# Altium PCB CAN_TO_USART_V2.2.PcbDoc (part 2 of 2)
Units mil, origin at the board's own origin, x right, y up, seen from the top; angles counter-clockwise.
Board outline 2554.34 x 2204.34 mil, 2 copper layers (Top Layer, Bottom Layer); 154 components, 100 nets, 467 pads, 218 vias.
Unrouted connection lines stored in the file: 118.
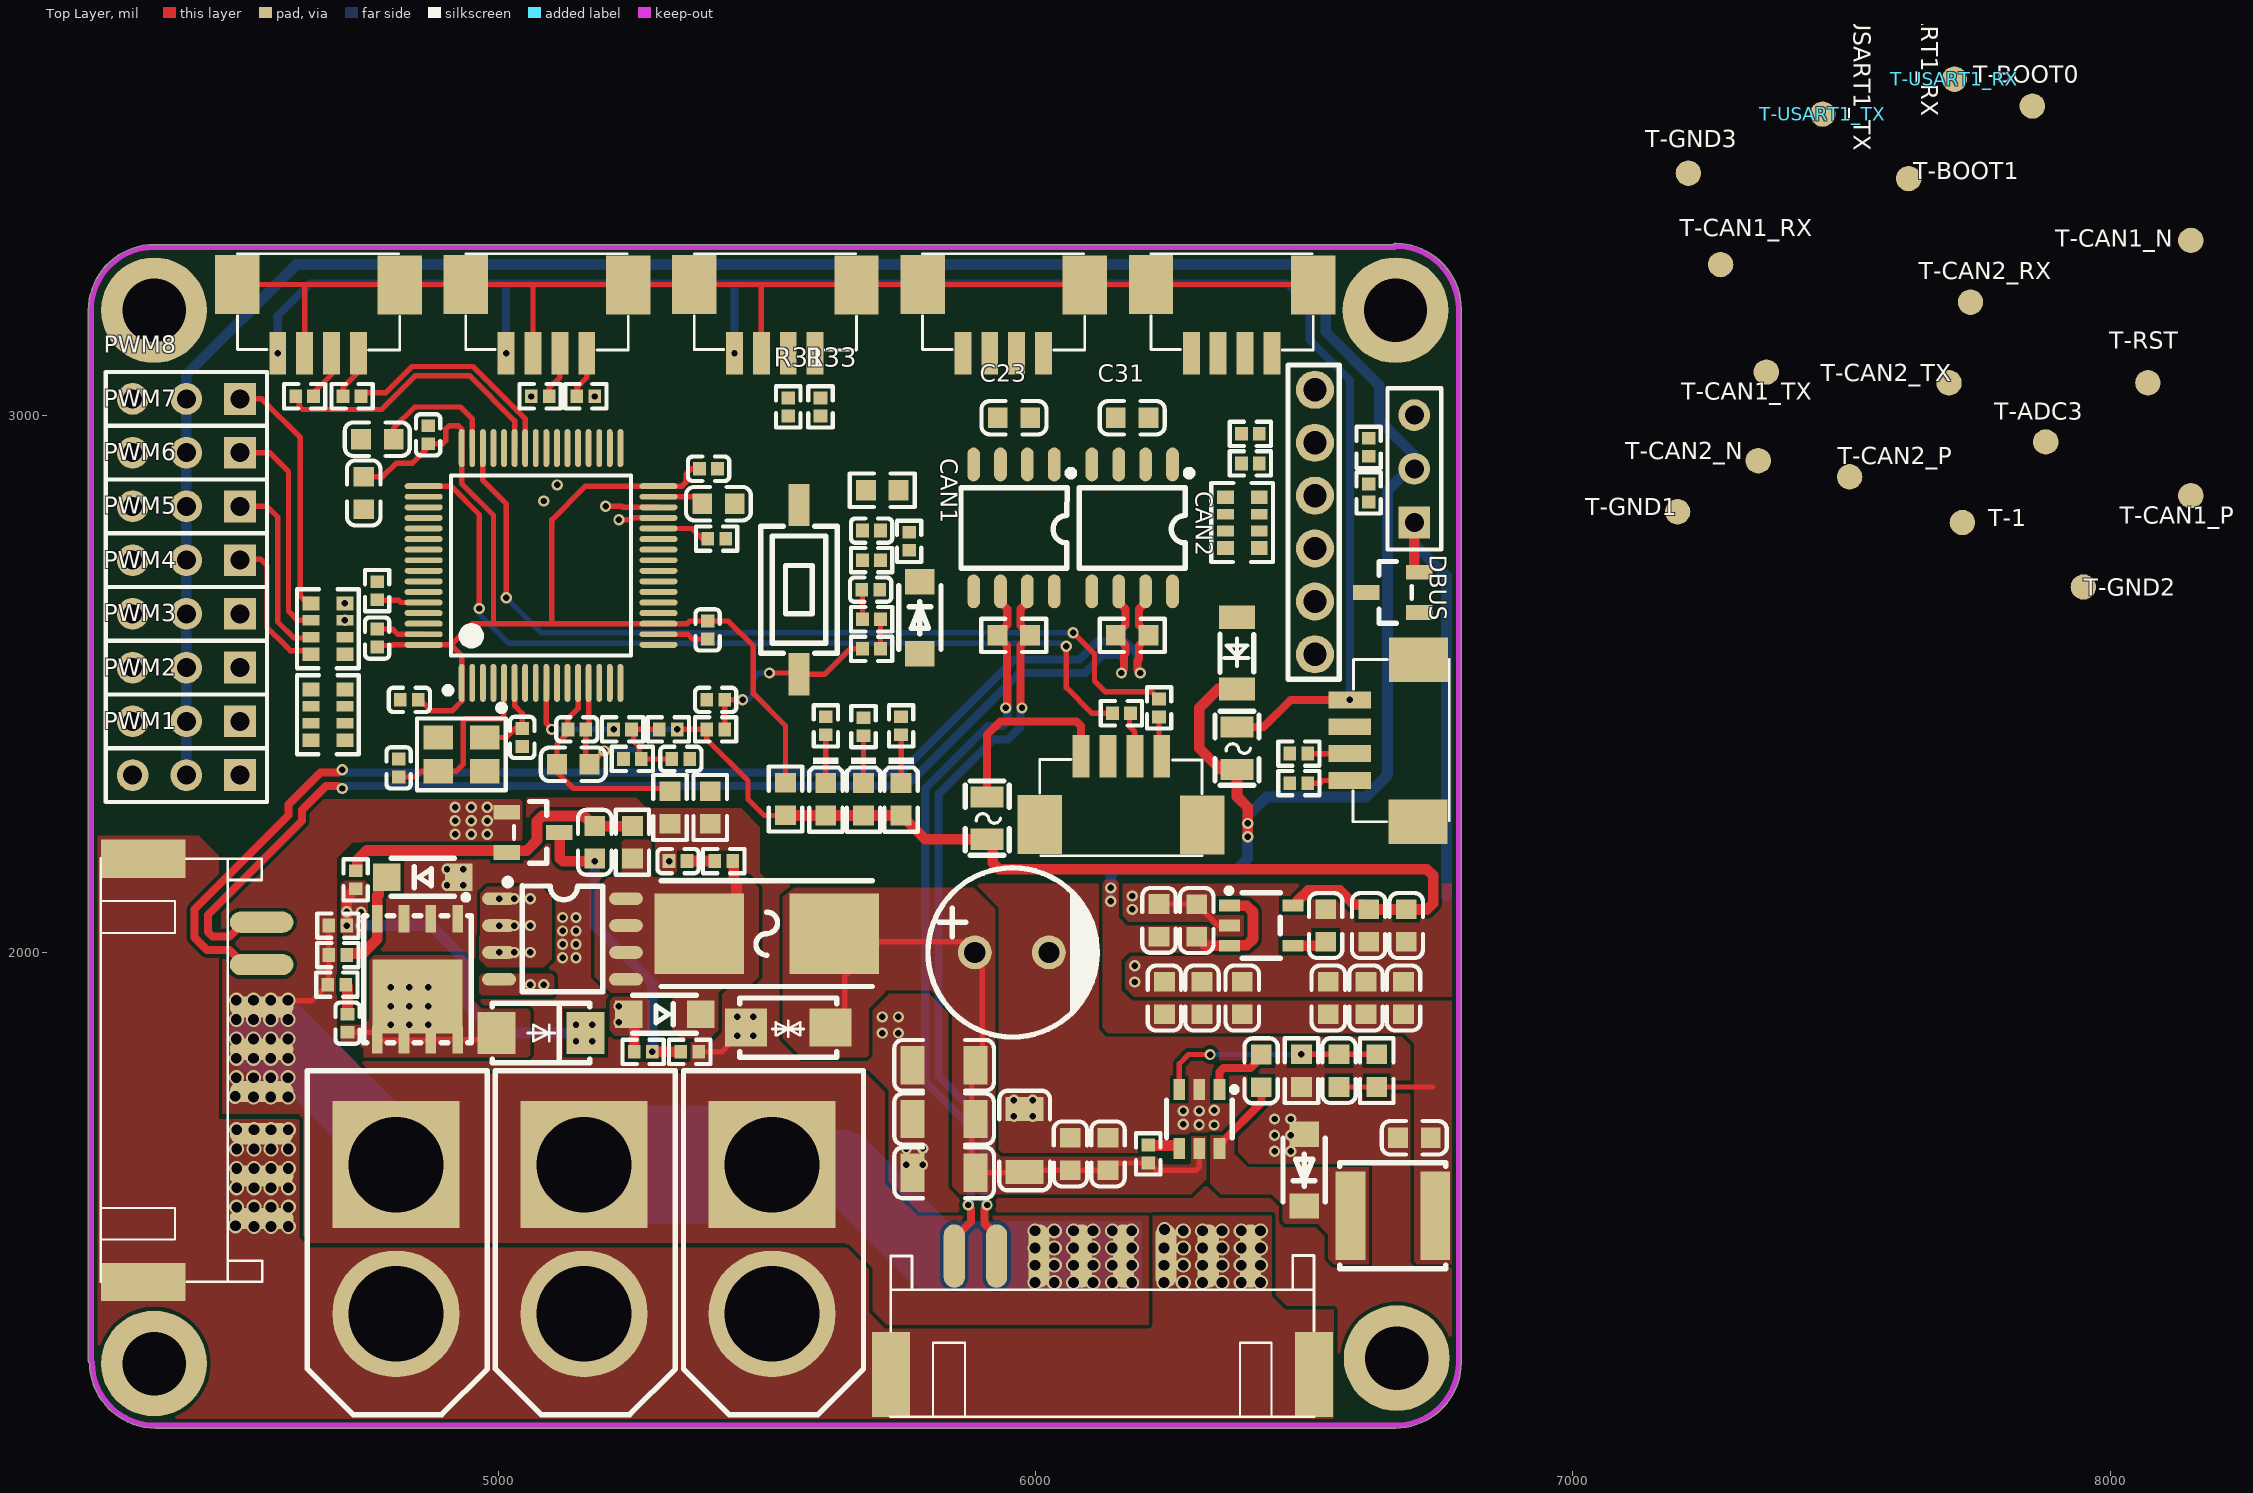
[diagram p0: Top Layer view]

## Silkscreen, mask and mechanical layers (free items; w line width, h text height)
Top Overlay:
Bottom Overlay:
Top Solder:
  rectangle: 5980,1371 6198,1500
  rectangle: 6220,1371 6438,1500
  region: 4629,1712 4629,1930 4500,1930 4500,1712
  region: 4629.66,1471.03 4629.66,1689.03 4500.66,1689.03 4500.66,1471.03
Bottom Solder:
  region: 4624,1712 4624,1930 4495,1930 4495,1712
  region: 4624.66,1471.03 4624.66,1689.03 4495.66,1689.03 4495.66,1471.03
  rectangle: 5980,1371 6198,1500
  rectangle: 6220,1371 6438,1500
  lines w130: 4603.35,1837.81 4825.85,1615.31 ; 5510,1605 5640,1605 5810,1435 6035,1435 6075,1435
  lines w220: 5160,1605 5510,1605
Mechanical 1:
  lines w10: 4243.92,1238.23 ccw(c4362.15,1238.23) 4362.15,1120 ; 4243.92,1238.23 ccw(c4362.15,1238.23) 4362.15,1120 ; 4243.92,1238.23 4243.92,3193.92 4242.85,3195 cw(c4360,3195) 4360,3312.15 ; 4243.92,1238.23 4242.85,1239.31 4243.92,1238.23 ; 4360,3312.15 4362.15,3314.31 ; 4360,3312.15 4362.15,3314.31 ; 4362.15,1120 6670,1120 ; 4362.15,3314.31 6670,3314.31 cw(c6670,3197.15) 6787.15,3197.15 6787.15,1237.15 cw(c6670,1237.15) 6670,1120 ; 6670,1120 6670,1120 ; 6670,1120 6670,1120 ; 6670,1120 6670,1120